# EAGLE board CT_schematic (EAGLE 7.6.0)

Size 100 x 80 mm. Coordinates in mm from the lower left corner, seen from the top.
Outline: 0,0 100,0 100,80 0,80 0,0
Copper layers (1*16): Top 0.035mm / dielectric 1.5mm / Bottom 0.035mm
Design rules "default": minimum track width 10mil, minimum drill 24mil, track to track 8mil, track to pad 8mil, pad to pad 8mil, via to via 8mil, smd to smd 8mil, copper to edge 40mil, drill to drill 8mil, minimum pad ring 10mil, minimum via ring 8mil, stop-mask expansion 4mil, vias tented up to drill 0mil, thermal gap 10mil

## Footprints (pad centres in the part's own frame; a part is rotated, then mirrored left to right if it is on the bottom)
C0603 = smd 0.8 x 0.8: 1 -0.762,0; 2 0.762,0
C0402 = smd 0.5 x 0.5: 1 -0.508,0; 2 0.508,0
C1206 = smd 1.3 x 1.6: 1 -1.524,0; 2 1.524,0
C0805 = smd 1.2 x 1.3: 1 -1.016,0; 2 1.016,0
C1210 = smd 1.2 x 2.5: 1 -1.524,0; 2 1.524,0
EXV-9H = smd 3.505 x 1.676: 1 -2.857,0; 2 2.857,0
L0603 = smd 0.8 x 0.8: 1 -0.762,0; 2 0.762,0
PJ-037B_PACKAGE = drill 3.7 square: 1 12,0 | drill 3.2 square: 2 6,0
R0603 = smd 0.8 x 0.8: 1 -0.762,0; 2 0.762,0
UFQFPN32 = smd 0.6 x 0.3: 1 -2.35,1.75; 2 -2.35,1.25; 3 -2.35,0.75; 4 -2.35,0.25; 5 -2.35,-0.25; 6 -2.35,-0.75; 7 -2.35,-1.25; 8 -2.35,-1.75; 17 2.35,-1.75; 18 2.35,-1.25; 19 2.35,-0.75; 20 2.35,-0.25; 21 2.35,0.25; 22 2.35,0.75; 23 2.35,1.25; 24 2.35,1.75 | smd 0.3 x 0.6: 9 -1.75,-2.35; 10 -1.25,-2.35; 11 -0.75,-2.35; 12 -0.25,-2.35; 13 0.25,-2.35; 14 0.75,-2.35; 15 1.25,-2.35; 16 1.75,-2.35; 25 1.75,2.35; 26 1.25,2.35; 27 0.75,2.35; 28 0.25,2.35; 29 -0.25,2.35; 30 -0.75,2.35; 31 -1.25,2.35; 32 -1.75,2.35 | smd 3.45 x 3.45: EPAD 0,0
TST-110-05-T-D-RA = drill 1 pad 1.7 square: 1 0,0 | drill 1 pad 1.7: 2 0,2.54; 3 2.54,0; 4 2.54,2.54; 5 5.08,0; 6 5.08,2.54; 7 7.62,0; 8 7.62,2.54; 9 10.16,0; 10 10.16,2.54; 11 12.7,0; 12 12.7,2.54; 13 15.24,0; 14 15.24,2.54; 15 17.78,0; 16 17.78,2.54; 17 20.32,0; 18 20.32,2.54; 19 22.86,0; 20 22.86,2.54
TDFN-8/6MM = smd 0.3 x 0.75: 1 0,0; 2 0.5,0; 3 1,0; 4 1.5,0; 5 1.5,3; 6 1,3; 7 0.5,3; 8 0,3
QFN-32 = smd 0.6 x 0.3: 1 -2.3,1.75; 2 -2.3,1.25; 3 -2.3,0.75; 4 -2.3,0.25; 5 -2.3,-0.25; 6 -2.3,-0.75; 7 -2.3,-1.25; 8 -2.3,-1.75; 17 2.3,-1.75; 18 2.3,-1.25; 19 2.3,-0.75; 20 2.3,-0.25; 21 2.3,0.25; 22 2.3,0.75; 23 2.3,1.25; 24 2.3,1.75 | smd 0.3 x 0.6: 9 -1.75,-2.3; 10 -1.25,-2.3; 11 -0.75,-2.3; 12 -0.25,-2.3; 13 0.25,-2.3; 14 0.75,-2.3; 15 1.25,-2.3; 16 1.75,-2.3; 25 1.75,2.3; 26 1.25,2.3; 27 0.75,2.3; 28 0.25,2.3; 29 -0.25,2.3; 30 -0.75,2.3; 31 -1.25,2.3; 32 -1.75,2.3 | smd 3.2 x 3.2: EXP 0,0
SJ-43515TS-SMT-TR = smd 2.2 x 3: 1 0.6,-7.4; 4 3.4,-7.4 | smd 3 x 3: 2 12.8,-7.4; 5 17,-3 | smd 2 x 3: 3 5.3,0; 6 2.5,0 | drill 1.8: P$7 4.5,-3.69; P$8 11.54,-3.69
WM-64PC = drill 0.6 pad 1: 1 -1,0.95; 2 -1,-0.95
ASFL1 = smd 1.7 x 1.5: 1 -1.27,-1.1; 2 1.27,-1.1; 3 1.27,1.1; 4 -1.27,1.1
ASDMB-XX.XXXXMHZ-XX-XX-XXX = smd 0.65 x 0.85: 1 0.45,0.2; 2 2.05,0.2; 3 2.05,1.8; 4 0.45,1.8
WSON-8 = smd 0.3 x 0.6: 1 -0.75,0; 2 0.05,0; 3 0.85,0; 4 1.65,0; 5 1.65,3.8; 6 0.85,3.8; 7 0.05,3.8; 8 -0.75,3.8 | smd 3 x 2.6: PAD 0.45,1.9
SON-6 = smd 0.55 x 0.3: 1 -0.355,0.5 | smd 0.52 x 0.3: 2 -0.37,0; 3 -0.37,-0.5; 4 0.37,-0.5; 5 0.37,0; 6 0.37,0.5
SW_4-1437565-2 = smd 1.4 x 2.1: 1 -2.23,4.55; 2 -2.23,-4.55; 3 2.23,4.55; 4 2.23,-4.55
LGM67K-G1J2-24-Z = smd 0.8 x 1.4: A -2,0; C 0,0
NC7SZ125M5X = smd 1.3 x 0.7: 1 -1.3,0.95; 2 -1.3,0; 3 -1.3,-0.95; 4 1.3,-0.95; 5 1.3,0.95

## Placement (x,y rotation side)
C1  1e-07  [C0603]  -63.5,74.93 0 top  (outside the outline)
C2  1e-07  [C0603]  -67.31,74.93 0 top  (outside the outline)
C3  4.7e-06  [C0603]  -59.69,74.93 0 top  (outside the outline)
C4  1e-08  [C0603]  -71.12,74.93 0 top  (outside the outline)
C5  1e-06  [C0603]  -74.93,74.93 0 top  (outside the outline)
C6  1e-07  [C0402]  -22.86,85.09 0 top  (outside the outline)
C7  1e-08  [C0402]  -26.67,85.09 0 top  (outside the outline)
C8  1e-06  [C0603]  -15.24,80.01 0 top  (outside the outline)
C9  1e-06  [C0603]  -19.05,80.01 0 top  (outside the outline)
C10  1e-06  [C0603]  -22.86,80.01 0 top  (outside the outline)
C11  1e-06  [C0603]  -26.67,80.01 0 top  (outside the outline)
C12  1e-06  [C0603]  -30.48,80.01 0 top  (outside the outline)
C13  1e-06  [C0603]  -34.29,80.01 0 top  (outside the outline)
C14  1e-06  [C0603]  -38.1,80.01 0 top  (outside the outline)
C15  1e-07  [C0402]  -30.48,85.09 0 top  (outside the outline)
C16  1e-07  [C0402]  -34.29,85.09 0 top  (outside the outline)
C17  1e-07  [C0402]  -38.1,85.09 0 top  (outside the outline)
C18  1e-07  [C0402]  -41.91,85.09 0 top  (outside the outline)
C19  1e-06  [C0603]  -41.91,80.01 0 top  (outside the outline)
C20  1e-08  [C0402]  -45.72,85.09 0 top  (outside the outline)
C21  1e-08  [C0402]  -49.53,85.09 0 top  (outside the outline)
C22  1e-08  [C0402]  -53.34,85.09 0 top  (outside the outline)
C23  1e-05  [C1206]  -35.56,67.31 0 top  (outside the outline)
C24  1e-05  [C0805]  -53.34,67.31 0 top  (outside the outline)
C25  1e-06  [C0603]  -45.72,80.01 0 top  (outside the outline)
C26  1e-05  [C1210]  -29.21,68.58 0 top  (outside the outline)
C27  1e-07  [C0402]  -57.15,85.09 0 top  (outside the outline)
C28  0.0001  [EXV-9H]  -54.61,60.96 0 top  (outside the outline)
C29  0.0001  [EXV-9H]  -66.04,60.96 0 top  (outside the outline)
C30  1e-08  [C0402]  -60.96,85.09 0 top  (outside the outline)
C31  1e-08  [C0402]  -64.77,85.09 0 top  (outside the outline)
F1  240.0  [L0603]  -49.53,80.01 0 top  (outside the outline)
J1  PJ-037B  [PJ-037B_PACKAGE]  -55.88,29.21 0 top  (outside the outline)
R1  10000.0  [R0603]  -25.4,74.93 0 top  (outside the outline)
R2  1000.0  [R0603]  -53.34,80.01 0 top  (outside the outline)
R3  910.0  [R0603]  -57.15,80.01 0 top  (outside the outline)
R4  4700.0  [R0603]  -60.96,80.01 0 top  (outside the outline)
R5  2200.0  [R0603]  -64.77,80.01 0 top  (outside the outline)
R6  2200.0  [R0603]  -68.58,80.01 0 top  (outside the outline)
R7  10000.0  [R0603]  -30.48,74.93 0 top  (outside the outline)
R8  10000.0  [R0603]  -35.56,74.93 0 top  (outside the outline)
R9  10000.0  [R0603]  -40.64,74.93 0 top  (outside the outline)
R10  1270.0  [R0603]  -72.39,80.01 0 top  (outside the outline)
R11  1270.0  [R0603]  -76.2,80.01 0 top  (outside the outline)
R12  100000.0  [R0603]  -63.5,67.31 0 top  (outside the outline)
R13  806.0  [R0603]  -15.24,85.09 0 top  (outside the outline)
R14  1000.0  [R0603]  -19.05,85.09 0 top  (outside the outline)
R15  100000.0  [R0603]  -68.58,67.31 0 top  (outside the outline)
R16  153694.38  [R0603]  -58.42,67.31 0 top  (outside the outline)
R17  100000.0  [R0603]  -73.66,67.31 0 top  (outside the outline)
R18  10000.0  [R0603]  -45.72,74.93 0 top  (outside the outline)
R19  10000.0  [R0603]  -50.8,74.93 0 top  (outside the outline)
R20  82000.0  [R0603]  -55.88,74.93 0 top  (outside the outline)
R21  300000.0  [R0603]  -15.24,74.93 0 top  (outside the outline)
R22  120000.0  [R0603]  -20.32,74.93 0 top  (outside the outline)
U1  stm32f038k6u6  [UFQFPN32]  -49.53,41.91 0 top  (outside the outline)
U2  TST-110-05-T-D-RA  [TST-110-05-T-D-RA]  -46.99,58.42 0 top  (outside the outline)
U3  24AA01T-I/MNY  [TDFN-8/6MM]  -64.77,40.64 0 top  (outside the outline)
U4  SGTL5000XNAA3  [QFN-32]  -34.29,41.91 0 top  (outside the outline)
U5  SJ-43515TS-SMT-TR  [SJ-43515TS-SMT-TR]  -45.72,10.16 0 top  (outside the outline)
U6  SJ-43515TS-SMT-TR  [SJ-43515TS-SMT-TR]  -73.66,10.16 0 top  (outside the outline)
U7  SJ-43515TS-SMT-TR  [SJ-43515TS-SMT-TR]  -39.37,31.75 0 top  (outside the outline)
U8  WM-64PCT  [WM-64PC]  -20.32,41.91 0 top  (outside the outline)
U9  ASFL-24.57MHZ-NCS  [ASFL1]  -66.04,52.07 0 top  (outside the outline)
U10  ASDMB-25.000MHZ-EC-T  [ASDMB-XX.XXXXMHZ-XX-XX-XXX]  -16.51,1.27 0 top  (outside the outline)
U11  LP3878SDX-ADJ/NOPB  [WSON-8]  -30.48,49.53 0 top  (outside the outline)
U12  LP2951ACSDX/NOPB  [WSON-8]  -48.26,49.53 0 top  (outside the outline)
U13  TPS3895ADRYR  [SON-6]  -67.31,83.82 0 top  (outside the outline)
U14  4-1437565-2  [SW_4-1437565-2]  -72.39,27.94 0 top  (outside the outline)
U15  Q65110A2395  [LGM67K-G1J2-24-Z]  -17.78,68.58 0 top  (outside the outline)
U16  nc7sz125m5x  [NC7SZ125M5X]  -40.64,67.31 0 top  (outside the outline)
U17  nc7sz125m5x  [NC7SZ125M5X]  -46.99,67.31 0 top  (outside the outline)

## Library data of the parts
C1-C31 F1 J1 R1-R22 U1-U17 = circuit_tree

## Nets
CLK_U1_2: U1.2 U10.3
CLK_U4_21: U4.21 U9.3
GND: C1.2 C2.2 C3.2 C4.2 C5.2 C6.2 C7.2 C15.2 C16.2 C17.2 C18.2 C19.2 C20.2 C21.2 C22.2 C23.2 C24.2 C25.2 C26.2 C27.2 C28.2 C29.2 C30.2 C31.2 J1.2 R2.2 R7.2 R8.2 R11.2 R14.2 R17.2 R20.2 R22.2 U1.EPAD U2.4 U2.6 U2.8 U2.10 U2.12 U2.14 U2.16 U2.18 U2.20 U3.4 U3.7 U4.1 U4.3 U4.7 U4.EXP U6.1 U7.1 U8.2 U9.2 U10.2 U11.3 U11.PAD U12.3 U12.4 U12.PAD U13.2 U15.C U16.2 U16.3 U17.1 U17.3
NET_U1_4: R4.1 U1.4 U17.4
NET_U1_5: C4.1 C5.1 F1.1 U1.5
NET_U1_16: R8.1 U1.16
NET_U1_19: R5.1 U1.19 U3.6
NET_U1_20: R6.1 U1.20 U3.5
NET_U1_30: R3.1 U1.30 U15.A
NET_U1_31: R7.1 U1.31
NET_U1_32: R1.1 U1.32 U14.3 U14.4
NET_U4_10: C18.1 U4.10
NET_U4_29: R10.1 U4.29
NET_U4_31: R11.1 U4.31
NET_U5_1: U4.4 U5.1
NET_U5_2: U4.2 U5.2
NET_U5_5: U4.6 U5.5
NET_U6_2: C9.1 U6.2
NET_U6_5: C8.1 U6.5
NET_U6_11: C9.2
NET_U6_12: C8.2
NET_U7_2: C11.1 C12.1 U7.2
NET_U7_5: C10.1 U7.5
NET_U7_13: C11.2 C12.2
NET_U7_14: C10.2
NET_U8_1: C13.1 C14.1 C19.1 U4.16 U8.1
NET_U8_15: C13.2 C14.2
NET_U11_1: C22.1 U11.1
NET_U11_6: R13.2 R14.1 U11.6
NET_U11_8: R12.1 U11.8
NET_U12_5: R15.1 U12.5
NET_U12_7: R16.2 R17.1 U12.7
NET_U13_1: R19.1 R20.1 U13.1
NET_U13_3: R21.2 R22.1 U13.3
NET_U13_4: R18.1 U13.4 U16.4 U17.2
NET_U14_1: R2.1 U14.1 U14.2
PROC_I2S1_CK: U1.11 U4.24
PROC_I2S1_SD: U1.13 U4.26
PROC_I2S1_WS: U1.10 U4.23
PROC_SYS_SWCLK: U1.24 U2.9
PROC_SYS_SWDIO: U1.23 U2.7
RST_OUT_U2_SRESET_B: R9.1 U2.15 U16.1
VCC_S1_7V6: C23.1 C25.1 C28.1 C29.1 J1.1 R12.2 U11.4 U12.8
VCC_TIER1_1V8: C1.1 C2.1 C3.1 C6.1 C7.1 C15.1 C16.1 C17.1 C21.1 C24.1 C27.1 C30.1 C31.1 F1.2 R1.2 R3.2 R4.2 R5.2 R6.2 R9.2 R10.2 R13.1 R18.2 R19.2 R21.1 U1.1 U1.17 U2.1 U3.8 U4.5 U4.20 U4.30 U10.4 U11.5 U13.6 U16.5 U17.5
VCC_TIER1_3V3: C20.1 C26.1 R15.2 R16.1 U9.4 U12.1

## Tracks (layer width: path | path; a pad name or v marks a point on that pad's centre or on a via)
CLK_U1_2  (1 unrouted)
CLK_U4_21  (1 unrouted)
GND  (64 unrouted)
NET_U1_4  (2 unrouted)
NET_U1_5  (3 unrouted)
NET_U1_16  (1 unrouted)
NET_U1_19  (2 unrouted)
NET_U1_20  (2 unrouted)
NET_U1_30  (2 unrouted)
NET_U1_31  (1 unrouted)
NET_U1_32  (3 unrouted)
NET_U4_10  (1 unrouted)
NET_U4_29  (1 unrouted)
NET_U4_31  (1 unrouted)
NET_U5_1  (1 unrouted)
NET_U5_2  (1 unrouted)
NET_U5_5  (1 unrouted)
NET_U6_2  (1 unrouted)
NET_U6_5  (1 unrouted)
NET_U7_2  (2 unrouted)
NET_U7_5  (1 unrouted)
NET_U7_13  (1 unrouted)
NET_U8_1  (4 unrouted)
NET_U8_15  (1 unrouted)
NET_U11_1  (1 unrouted)
NET_U11_6  (2 unrouted)
NET_U11_8  (1 unrouted)
NET_U12_5  (1 unrouted)
NET_U12_7  (2 unrouted)
NET_U13_1  (2 unrouted)
NET_U13_3  (2 unrouted)
NET_U13_4  (3 unrouted)
NET_U14_1  (2 unrouted)
PROC_I2S1_CK  (1 unrouted)
PROC_I2S1_SD  (1 unrouted)
PROC_I2S1_WS  (1 unrouted)
PROC_SYS_SWCLK  (1 unrouted)
PROC_SYS_SWDIO  (1 unrouted)
RST_OUT_U2_SRESET_B  (2 unrouted)
VCC_S1_7V6  (7 unrouted)
VCC_TIER1_1V8  (36 unrouted)
VCC_TIER1_3V3  (5 unrouted)